# EAGLE board 190_Final.postroute (EAGLE 7.5.0)
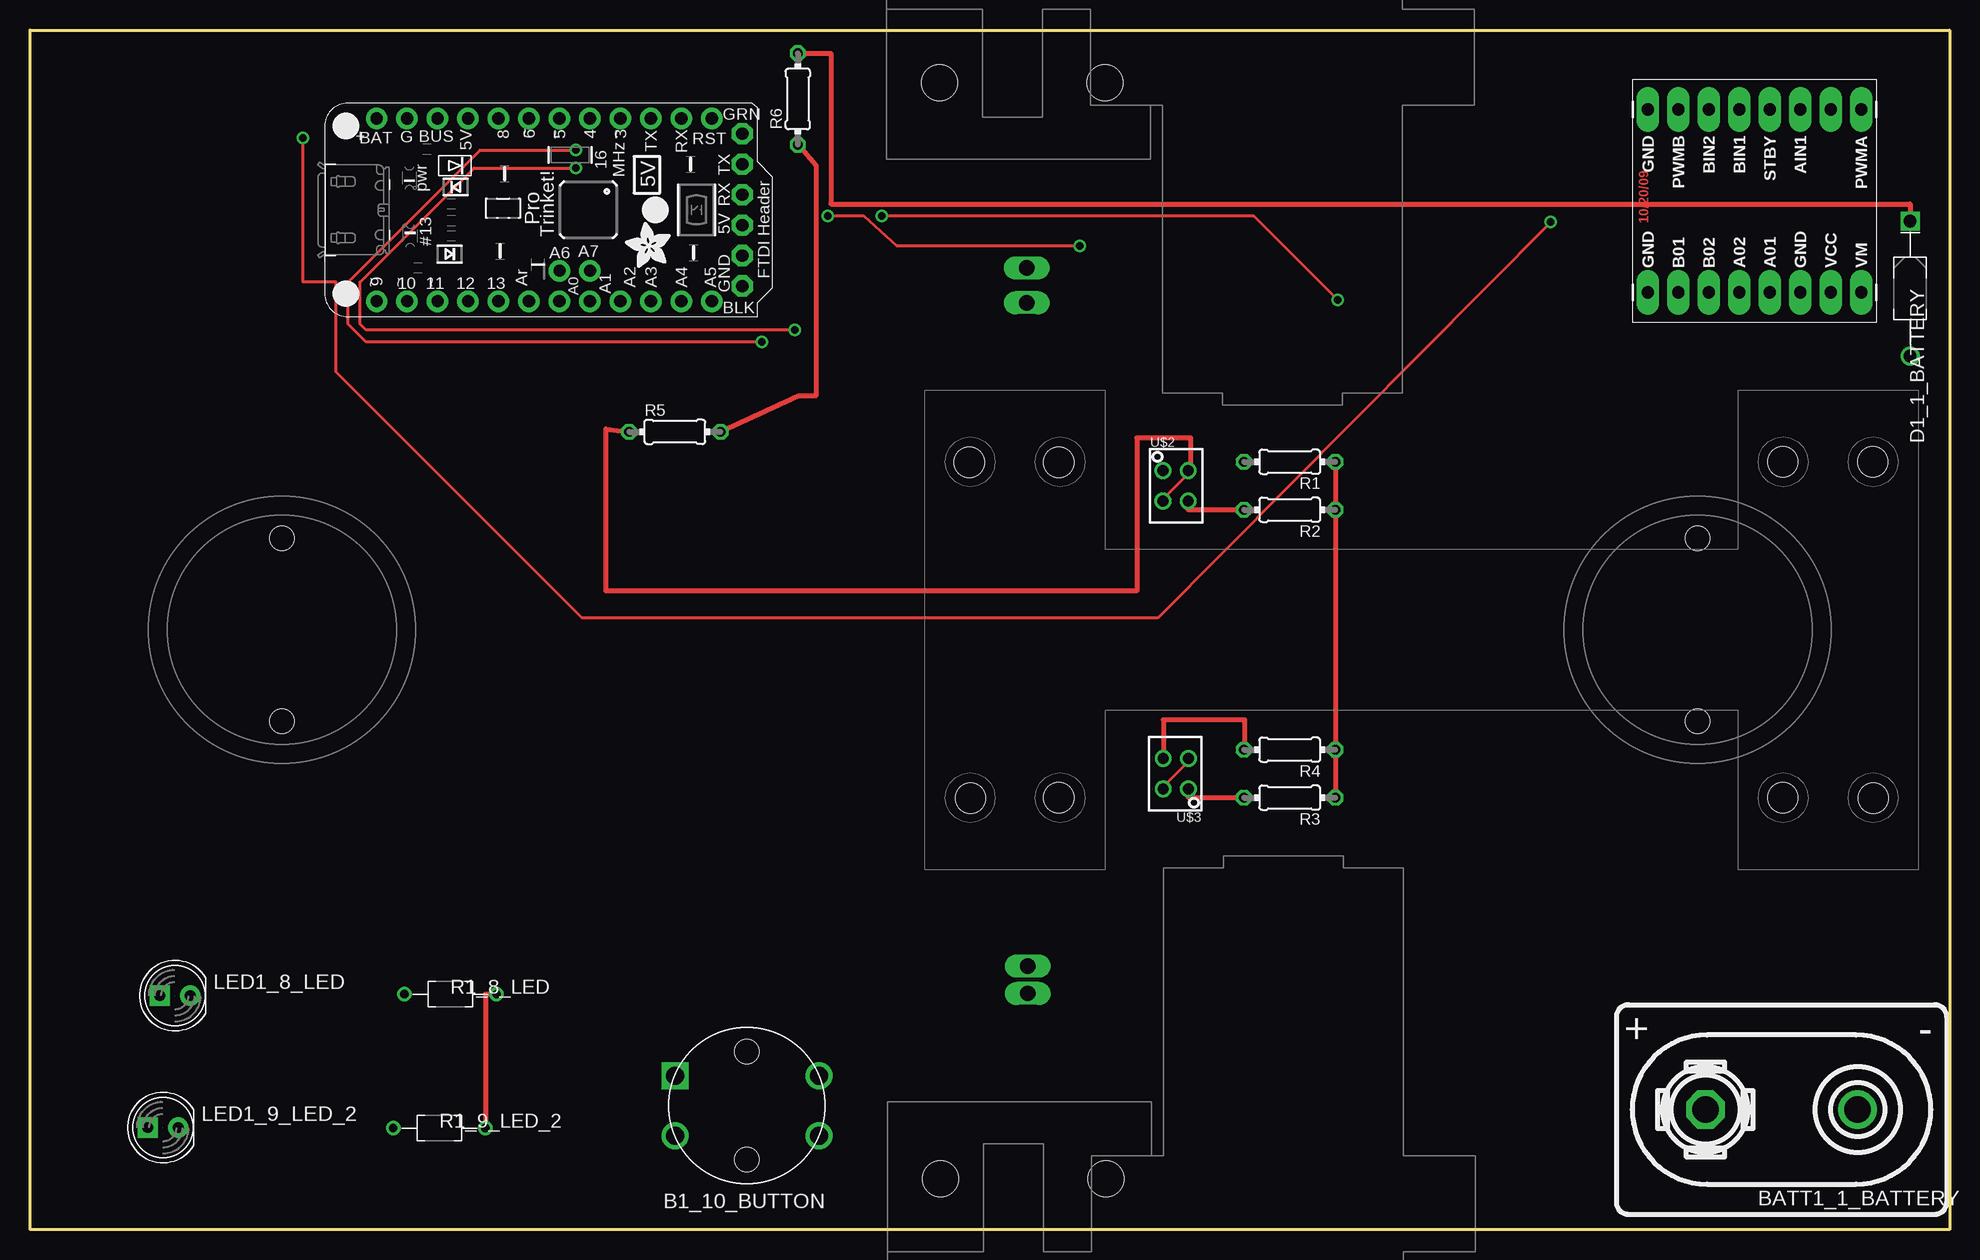
[diagram p0: board, top side]
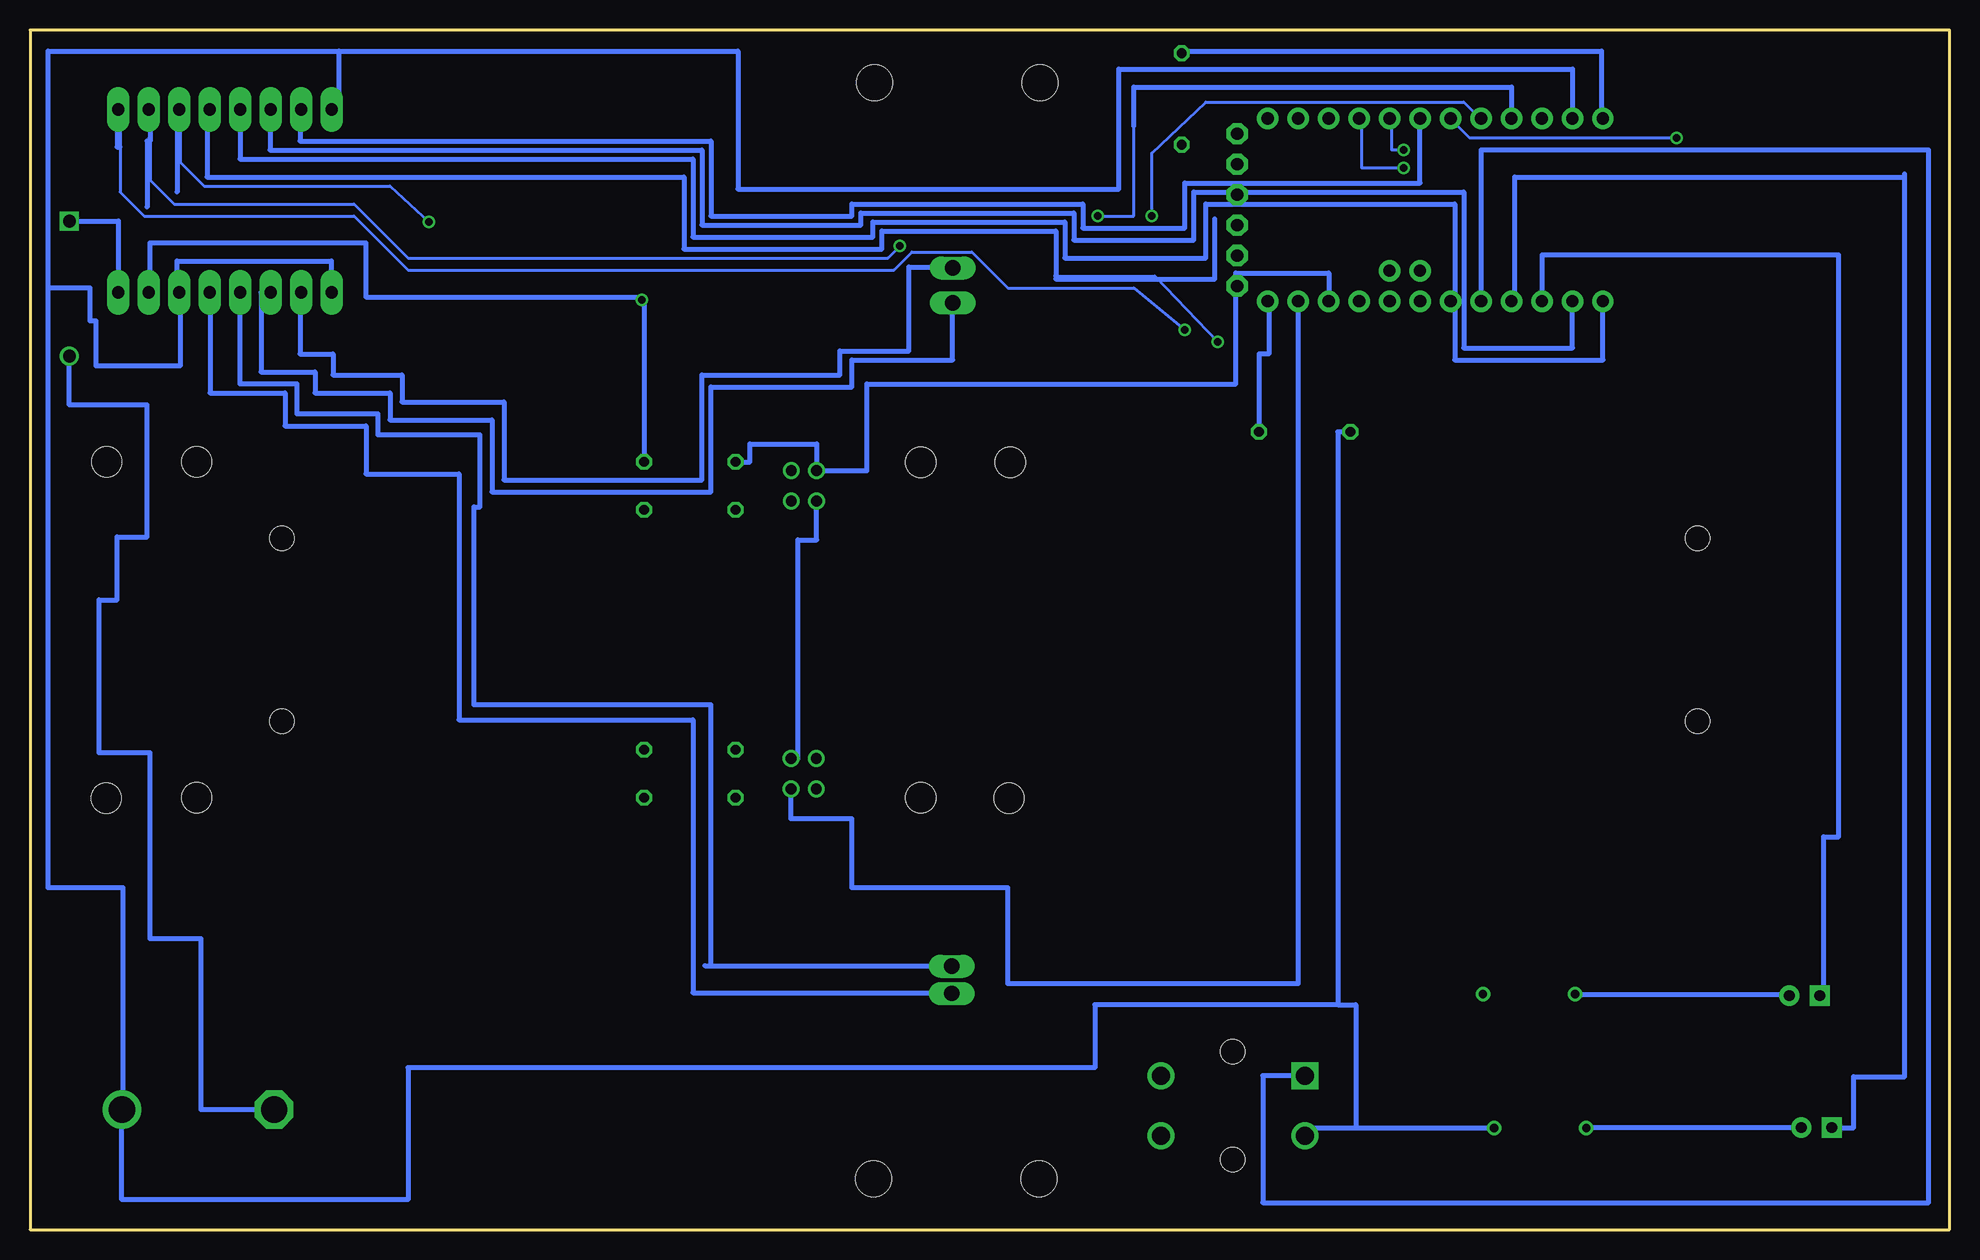
[diagram p1: board, bottom side, seen from below]

Size 160 x 100 mm. Coordinates in mm from the lower left corner, seen from the top.
Outline: 0,0 0,100 160,100 160,0 0,0
Copper layers (1*16): Top 0.035mm / dielectric 1.5mm / Bottom 0.035mm
Design rules "default *": minimum track width 0.6mm, minimum drill 0.9mm, track to track 15mil, track to pad 0.60mm, pad to pad 0.50mm, via to via 0.38mm, smd to smd 8mil, copper to edge 40mil, drill to drill 15mil, minimum pad ring 10mil, minimum via ring 8mil, stop-mask expansion 4mil, vias tented up to drill 0mil, thermal gap 10mil
tRestrict: area 55.8,75.8 to 58,78.8; area 55.8,91 to 58,94; area 53.2,75.8 to 55.5,78.8; area 53,91 to 55.2,94; area 52.5,11.8 to 55,14.2; area 52.5,6.5 to 55.5,9.5; area 50.8,75.8 to 53,78.8; area 50.5,91 to 52.8,94; area 48,75.8 to 50.2,78.8; area 48,91 to 50.2,94; area 45.5,75.8 to 47.8,78.8; area 45.5,91 to 47.8,94; 19 more areas

## Footprints (pad centres in the part's own frame; a part is rotated, then mirrored left to right if it is on the bottom)
BUTTON-TACTILE-ROUND-ADAFRUIT1009 = drill 1.5 square: P -6,2.5 | drill 1.5: P2 6,2.5; S -6,-2.5; S2 6,-2.5 | hole 2: 0,-4.5; 0,4.5
BATTERY_9V_KEYSTONE_968 = drill 2.2: N 6.35,0 | drill 2.2 octagon: P -6.35,0
DIOAD1125W78L520D270_HS = drill 1.06 pad 1.59: A 5.625,0 | drill 1.06 pad 1.59 square: C -5.625,0
SPARKFUN_DUAL_MOTOR_DRIVER = drill 1.016 pad 1.88 long: A01 7.62,1.27; A02 7.62,-1.27; AIN1 -7.62,3.81; AIN2 -7.62,6.35; B01 7.62,-6.35; B02 7.62,-3.81; BIN1 -7.62,-1.27; BIN2 -7.62,-3.81; GND -7.62,-8.89; GND1 7.62,3.81; GND2 7.62,-8.89; PWMA -7.62,8.89; PWMB -7.62,-6.35; STBY -7.62,1.27; VCC 7.62,6.35; VM 7.62,8.89
SOLARBOTICS_G2_LEFT = drill 1.27 long: + -40.545,-3.68; - -43.45,-3.68 | hole 3: -25.1,-10.2; -25.1,3.6
LED5MM = drill 0.9 pad 1.676 square: A -1.27,0 | drill 0.9 pad 1.676: K 1.27,0
0204/7 = drill 0.813 octagon: 1 -3.81,0; 2 3.81,0
RESAD770W45L370D210_HS = drill 0.7 pad 1.1: 1 -3.85,0; 2 3.85,0
SOLARBOTICS_G2 = drill 1.27 long: + 40.545,-3.68; - 42.815,-3.68 | hole 3: 25.1,-10.2; 25.1,3.6
ADAFRUIT-PRO-TRINKET-5V = drill 1.016 pad 1.778: +5V 7.62,24.13; A0 -7.62,16.51; A1 -7.62,13.97; A2 -7.62,11.43; A3 -7.62,8.89; A4 -7.62,6.35; A5 -7.62,3.81; AREF -7.62,19.05; D3 7.62,11.43; D4 7.62,13.97; D5 7.62,16.51; D6 7.62,19.05; D8 7.62,21.59; D9 -7.62,31.75; D10 -7.62,29.21; D11 -7.62,26.67; D12 -7.62,24.13; D13 -7.62,21.59; GND2 7.62,29.21; RESET 7.62,3.81; RXD1 7.62,6.35; TXD1 7.62,8.89; VBAT 7.62,31.75; VBUS1 7.62,26.67 | drill 1 pad 1.778: A6 -5.08,16.51; A7 -5.08,13.97 | drill 1.016 pad 1.778 octagon: DTR/RTS 6.35,1.27; GND -6.35,1.27; GND1 -3.81,1.27; RXD 1.27,1.27; TXD 3.81,1.27; VBUS -1.27,1.27
ADAFRUIT-3/4IN-CASTER = hole 2: -7.62,0; 7.62,0
PHONE_STAND = hole 2.5: -30.25,-14; -30.25,13.95; -37.6,-14.05; -37.7,13.95; 30.1,-14; 30.1,14; 37.6,14; 37.65,-14.05
QRD1114 = drill 0.9: 1 -1.067,1.27; 2 -1.067,-1.27; 3 1.041,-1.27; 4 1.041,1.27

## Placement (x,y rotation side)
B1_10_BUTTON  BUTTON-TACTILE-ROUND  [BUTTON-TACTILE-ROUND-ADAFRUIT1009]  59.75,10.33 0 top
BATT1_1_BATTERY  BATTERY-9V-VERTICAL  [BATTERY_9V_KEYSTONE_968]  146,10 0 top
D1_1_BATTERY  [DIOAD1125W78L520D270_HS]  156.71,78.44 270 top
DRVR_2_DRIVE  SPARKFUN_DUAL_MOTOR_DRIVER-BOB  [SPARKFUN_DUAL_MOTOR_DRIVER]  143.75,85.75 270 top
L_2_DRIVE  SOLARBOTICS_GM2_LEFT  [SOLARBOTICS_G2_LEFT]  79.41,120.71 90 top
LED1_8_LED  [LED5MM]  12.08,19.5 0 top
LED1_9_LED_2  [LED5MM]  11.08,8.5 0 top
R1  [0204/7]  105,64 180 top
R1_8_LED  330  [RESAD770W45L370D210_HS]  35.04,19.62 0 top
R1_9_LED_2  330  [RESAD770W45L370D210_HS]  34.12,8.46 0 top
R2  [0204/7]  105,60 180 top
R3  [0204/7]  105,36 180 top
R4  [0204/7]  105,40 180 top
R5  [0204/7]  53.75,66.5 0 top
R6  [0204/7]  64,94.25 90 top
R_2_DRIVE  SOLARBOTICS_GM2  [SOLARBOTICS_G2]  79.49,-20.86 90 top
U1_0_BRAIN  ADAFRUIT-PRO-TRINKET-5V-BOB  [ADAFRUIT-PRO-TRINKET-5V]  60.64,85 90 top
U1_6_CASTER  CASTERADAFRUIT-3/4IN  [ADAFRUIT-3/4IN-CASTER]  21,50 90 top
U1_7_CASTER_2  CASTERADAFRUIT-3/4IN  [ADAFRUIT-3/4IN-CASTER]  139,50 90 top
U$1  [PHONE_STAND]  116,50 0 top
U$2  QRD1114  [QRD1114]  95.5,62 0 top
U$3  QRD1114  [QRD1114]  95.5,38 180 top

## Library data of the parts
B1_10_BUTTON = Components; DIST: Adafruit; DISTPN: 1009; HIERARCHY_NAME: button.B1
BATT1_1_BATTERY = Components; HIERARCHY_NAME: battery.BATT1
D1_1_BATTERY = KoalaBuild; DATASHEET: http://www.st.com/web/en/resource/technical/document/datasheet/CD00001625.pdf; DATA_SHEET: http://www.st.com/web/en/resource/technical/document/datasheet/CD00001625.pdf; DB: /home/michael/gtron_devel/Gadgets/Tools/Koala/Koala/PartLibrary/Digikey/Schottky-Diodes-TH.csv; DEVICE: TH-DO-41-AND-DO-204AL; DIST: Digikey; DISTPN: 497-4547-1-ND; HIERARCHY_NAME: battery.D1; IMAGE: http://media.digikey.com/photos/STMicro%20Photos/1N5819.JPG; IRECT: 1A; MFR: STMicroelectronics; MIN_QTY: 1; MPN: 1N5817; PACKAGE: DIOAD1125W78L520D270_HS; PRICE: $0.57; SIZE: TH; STOCK: STOCK; VALUE: 450mV; VREV: 20V
DRVR_2_DRIVE = BOBs; DIST: Sparkfun; DISTPN: 9457; HIERARCHY_NAME: drive.DRVR
L_2_DRIVE = Components; DIST: Solarbotics; DISTPN: gm2; HIERARCHY_NAME: drive.L
LED1_8_LED = Components; DIST: Adafruit; DISTPN: 298; HIERARCHY_NAME: led.LED1
LED1_9_LED_2 = Components; DIST: Adafruit; DISTPN: 298; HIERARCHY_NAME: led_2.LED1
R1-R6 = resistor
R1_8_LED = KoalaBuild; CASE: TH; DATASHEET: http://www.yageo.com/NewPortal/yageodocoutput?fileName=/pdf/throughhole/Yageo_LR_CFR_2013.pdf; DATA_SHEET: http://www.yageo.com/NewPortal/yageodocoutput?fileName=/pdf/throughhole/Yageo_LR_CFR_2013.pdf; DB: /home/michael/gtron_devel/Gadgets/Tools/Koala/Koala/PartLibrary/Digikey/Resistors-TH.csv; DEVICE: TH-1/6W-CARBON; DIST: Digikey; DISTPN: 330EBK-ND; HIERARCHY_NAME: led.R1; IMAGE: http://media.digikey.com/Renders/Yageo%20Renders/CFR-12JR-330R.jpg; MFR: Yageo; MIN_QTY: 1; MPN: CFR-12JB-52-330R; PACKAGE: RESAD770W45L370D210_HS; PRICE: $0.10; PWR: 167mW; SIZE: TH; STOCK: STOCK; TOL: 5%; VALUE_QUERY: 330
R1_9_LED_2 = KoalaBuild; CASE: TH; DATASHEET: http://www.yageo.com/NewPortal/yageodocoutput?fileName=/pdf/throughhole/Yageo_LR_CFR_2013.pdf; DATA_SHEET: http://www.yageo.com/NewPortal/yageodocoutput?fileName=/pdf/throughhole/Yageo_LR_CFR_2013.pdf; DB: /home/michael/gtron_devel/Gadgets/Tools/Koala/Koala/PartLibrary/Digikey/Resistors-TH.csv; DEVICE: TH-1/6W-CARBON; DIST: Digikey; DISTPN: 330EBK-ND; HIERARCHY_NAME: led_2.R1; IMAGE: http://media.digikey.com/Renders/Yageo%20Renders/CFR-12JR-330R.jpg; MFR: Yageo; MIN_QTY: 1; MPN: CFR-12JB-52-330R; PACKAGE: RESAD770W45L370D210_HS; PRICE: $0.10; PWR: 167mW; SIZE: TH; STOCK: STOCK; TOL: 5%; VALUE_QUERY: 330
R_2_DRIVE = Components; DIST: Solarbotics; DISTPN: gm2; HIERARCHY_NAME: drive.R
U1_0_BRAIN = BOBs; DIST: Adafruit; DISTPN: 2000; HIERARCHY_NAME: brain.U1
U1_6_CASTER = Components; DIST: Adafruit; DISTPN: 1200; HIERARCHY_NAME: caster.u1
U1_7_CASTER_2 = Components; DIST: Adafruit; DISTPN: 1200; HIERARCHY_NAME: caster_2.u1
U$1 = 3DPrintedParts
U$2 U$3 = SparkFun-Sensors

## Nets
+5V_0_BRAIN: DRVR_2_DRIVE.VCC R1.1 R2.1 R3.1 R4.1 U1_0_BRAIN.+5V
A0_0_BRAIN: U1_0_BRAIN.A0
A1_0_BRAIN: U1_0_BRAIN.A1
A01_2_DRIVE: DRVR_2_DRIVE.A01 R_2_DRIVE.+
A2_0_BRAIN: U1_0_BRAIN.A2
A02_2_DRIVE: DRVR_2_DRIVE.A02 R_2_DRIVE.-
A3_0_BRAIN: R1.2 U1_0_BRAIN.A3 U$2.1
A4_0_BRAIN: R3.2 U1_0_BRAIN.A4 U$3.1
A5_0_BRAIN: R5.2 R6.1 U1_0_BRAIN.A5
A6_0_BRAIN: U1_0_BRAIN.A6
A7_0_BRAIN: U1_0_BRAIN.A7
AREF_0_BRAIN: U1_0_BRAIN.AREF
B01_2_DRIVE: DRVR_2_DRIVE.B01 L_2_DRIVE.+
B02_2_DRIVE: DRVR_2_DRIVE.B02 L_2_DRIVE.-
D3_0_BRAIN: DRVR_2_DRIVE.PWMA U1_0_BRAIN.D3
D4_0_BRAIN: DRVR_2_DRIVE.STBY U1_0_BRAIN.D4
D5_0_BRAIN: DRVR_2_DRIVE.PWMB U1_0_BRAIN.D5
D6_0_BRAIN: DRVR_2_DRIVE.AIN1 U1_0_BRAIN.D6
D8_0_BRAIN: DRVR_2_DRIVE.AIN2 U1_0_BRAIN.D8
D9_0_BRAIN: DRVR_2_DRIVE.BIN1 U1_0_BRAIN.D9
D10_0_BRAIN: DRVR_2_DRIVE.BIN2 U1_0_BRAIN.D10
D11_0_BRAIN: LED1_8_LED.A U1_0_BRAIN.D11
D12_0_BRAIN: LED1_9_LED_2.A U1_0_BRAIN.D12
D13_0_BRAIN: B1_10_BUTTON.P U1_0_BRAIN.D13
DISCONNECTED: U1_0_BRAIN.GND
DISCONNECTED_2: U1_0_BRAIN.GND1
DISCONNECTED_3: U1_0_BRAIN.VBUS
DTR/RTS_0_BRAIN: U1_0_BRAIN.DTR/RTS
GND_0_BRAIN: B1_10_BUTTON.S BATT1_1_BATTERY.N DRVR_2_DRIVE.GND DRVR_2_DRIVE.GND1 DRVR_2_DRIVE.GND2 R1_8_LED.2 R1_9_LED_2.2 R5.1 U1_0_BRAIN.GND2 U$2.2 U$2.4 U$3.2 U$3.4
N$1_1_BATTERY: BATT1_1_BATTERY.P D1_1_BATTERY.A
N$1_8_LED: LED1_8_LED.K R1_8_LED.1
N$1_9_LED_2: LED1_9_LED_2.K R1_9_LED_2.1
N$5: R2.2 U$2.3
N$7: R4.2 U$3.3
POS_1_BATTERY: D1_1_BATTERY.C DRVR_2_DRIVE.VM R6.2 U1_0_BRAIN.VBAT
RESET_0_BRAIN: U1_0_BRAIN.RESET
RXD1_0_BRAIN: U1_0_BRAIN.RXD1
RXD_0_BRAIN: U1_0_BRAIN.RXD
TXD1_0_BRAIN: U1_0_BRAIN.TXD1
TXD_0_BRAIN: U1_0_BRAIN.TXD
VBUS1_0_BRAIN: U1_0_BRAIN.VBUS1

## Tracks (layer width: path | path; a pad name or v marks a point on that pad's centre or on a via)
+5V_0_BRAIN  (via drill 0.6)
  Top 0.254: v71,84.5 102,84.5 v109,77.5
  Top 0.406: R3.1 R4.1 R2.1 R1.1
  Bottom 0.254: 68,92 68,84.5 v71,84.5 | v109,77.5 108.81,77.5
  Bottom 0.406: 68,92 68,95.25 36.51,95.25 U1_0_BRAIN.+5V | R1.1 108.81,77.5 108.81,77.75 132,77.75 132,82.25 150,82.25 150,78.13 DRVR_2_DRIVE.VCC
A01_2_DRIVE
  Bottom 0.406: R_2_DRIVE.+ 83.17,19.75 104.75,19.75 104.75,42.5 124.25,42.5 124.25,63 132,63 132,67 138.75,67 138.75,69.75 145,69.75 145,78.13 DRVR_2_DRIVE.A01
A02_2_DRIVE
  Bottom 0.406: 103.25,22 103.25,43.75 123,43.75 123,60.25 122.5,60.25 122.5,66.25 131,66.25 131,68 137.75,68 137.75,70.5 142.48,70.5 DRVR_2_DRIVE.A02 | 103.25,22 83.17,22 R_2_DRIVE.- | 103.75,22 103.25,22
A3_0_BRAIN
  Bottom 0.406: U1_0_BRAIN.A3 51.75,79.75 59.5,79.75 59.5,70.5 90.25,70.5 90.25,63.27 U$2.1 94.43,65.5 100,65.5 100,64 R1.2
A4_0_BRAIN
  Top 0.406: U$3.1 96.57,36 R3.2
  Bottom 0.406: U1_0_BRAIN.A4 54.29,20.5 78.5,20.5 78.5,28.5 91.5,28.5 91.5,34.25 96.57,34.25 U$3.1
A5_0_BRAIN
  Top 0.406: R5.2 64.06,69.5 65.5,69.5 65.5,88.69 R6.1
  Bottom 0.406: R5.2 57.56,73 56.75,73 56.75,77.39 U1_0_BRAIN.A5
B01_2_DRIVE
  Bottom 0.406: L_2_DRIVE.+ 83.09,80.25 86.75,80.25 86.75,73.25 92.5,73.25 92.5,71.25 104,71.25 104,62.5 120.5,62.5 120.5,69 129,69 129,71.25 134.75,71.25 134.75,73 137.5,73 137.5,78.13 DRVR_2_DRIVE.B01
B02_2_DRIVE
  Bottom 0.406: L_2_DRIVE.- 83.09,72.5 91.5,72.5 91.5,70.25 103.25,70.25 103.25,61.5 121.5,61.5 121.5,67.5 130,67.5 130,69.75 136.25,69.75 136.25,71.5 140.75,71.5 140.75,78.13 DRVR_2_DRIVE.B02
D3_0_BRAIN  (via drill 0.6)
  Top 0.254: v63.75,75 28,75 27.5,75.5 27.5,79 37,88.5 v45.5,88.5
  Bottom 0.254: v63.75,75 68,78.5 78.5,78.5 81.5,81.5 86.5,81.5 88,80 128.5,80 133,84.5 150.5,84.5 152.5,86.5 152.5,93 DRVR_2_DRIVE.PWMA | U1_0_BRAIN.D3 49,92.5 49,88.5 v45.5,88.5
  Bottom 0.406: DRVR_2_DRIVE.PWMA 152.75,93.37 152.75,90.25 152.5,90.25
D4_0_BRAIN  (via drill 0.6)
  Top 0.254: v61,74 28,74 26.5,75.5 26.5,79 37.5,90 v45.5,90
  Bottom 0.254: v61,74 66.25,79.5 74.5,79.5 | U1_0_BRAIN.D4 46.5,92.5 46.5,90 v45.5,90
  Bottom 0.406: 61.25,84.25 61.25,79.25 74.5,79.25 74.5,79.5 74.5,83.25 89,83.25 89,81.75 105.5,81.75 105.5,87.75 145.25,87.75 145.25,93.37 DRVR_2_DRIVE.STBY
D5_0_BRAIN
  Bottom 0.406: U1_0_BRAIN.D5 44.13,87.25 63.75,87.25 63.75,83.5 72.25,83.5 72.25,85.5 91.5,85.5 91.5,84.5 103.25,84.5 103.25,90.75 137.5,90.75 137.5,93.37 DRVR_2_DRIVE.PWMB
D6_0_BRAIN  (via drill 0.6)
  Top 0.254: v22.75,91 22.75,79 25.5,79 25.5,71.5 46,51 94,51 v126.75,84
  Bottom 0.254: U1_0_BRAIN.D6 41.5,92.5 40,91 v22.75,91 | v126.75,84 130,87 145.5,87 147.5,89 147.5,93 DRVR_2_DRIVE.AIN1
  Bottom 0.406: DRVR_2_DRIVE.AIN1 147.75,93.37 147.75,86.5
D8_0_BRAIN  (via drill 0.6)
  Top 0.254: v66.5,84.5 69.5,84.5 72.25,82 v87.5,82
  Bottom 0.254: v66.5,84.5 66.5,89.75 62,94 40.5,94 39.5,93 U1_0_BRAIN.D8 | 150,91 150,87.5 148,85.5 133,85.5 128.5,81 88.5,81 v87.5,82
  Bottom 0.406: DRVR_2_DRIVE.AIN2 150,93.37 150,91 150,90.75 150.25,90.75 150.25,85.25
D9_0_BRAIN
  Bottom 0.406: U1_0_BRAIN.D9 28.89,72.5 41.25,72.5 41.25,85.5 62,85.5 62,81 73.75,81 73.75,84 89.75,84 89.75,82.75 104.75,82.75 104.75,89.25 142.5,89.25 142.5,93.37 DRVR_2_DRIVE.BIN1
D10_0_BRAIN
  Bottom 0.406: U1_0_BRAIN.D10 31.43,73.5 40.5,73.5 40.5,86.5 63,86.5 63,82.5 73,82.5 73,84.75 90.75,84.75 90.75,83.75 104,83.75 104,90 140,90 140,93.37 DRVR_2_DRIVE.BIN2
D11_0_BRAIN
  Bottom 0.406: U1_0_BRAIN.D11 33.97,81.25 9.25,81.25 9.25,32.75 10.5,32.75 10.5,19.5 LED1_8_LED.A
D12_0_BRAIN
  Bottom 0.406: U1_0_BRAIN.D12 36.25,77.39 36.25,87.75 3.75,87.75 | LED1_9_LED_2.A 8,8.5 8,12.75 3.75,12.75 3.75,87.75 | 3.75,87.75 3.75,88
D13_0_BRAIN
  Bottom 0.406: B1_10_BUTTON.P 57.25,12.83 57.25,2.25 1.75,2.25 1.75,90 39.05,90 U1_0_BRAIN.D13 39.05,76.75 39.25,76.75
GND_0_BRAIN
  Top 0.254: U$3.4 94.5,37 96.5,39 U$3.2 | U$2.2 94.5,61 96.5,63 U$2.4
  Top 0.406: R5.1 48,66.75 48,53.25 92.25,53.25 92.25,66 96.75,66 96.75,63.27 U$2.4 | R1_8_LED.2 37.97,19.62 R1_9_LED_2.2
  Bottom 0.406: B1_10_BUTTON.S 53.75,7.75 54.25,7.75 54.25,8.45 49.5,8.45 | 51,18.75 49.5,18.75 49.5,8.45 | 51,18.75 71.25,18.75 71.25,13.5 128.5,13.5 128.5,2.5 152.35,2.5 BATT1_1_BATTERY.N 152.25,10 152.25,28.5 158.5,28.5 158.5,78.5 | 51,18.75 51,66.5 R5.1 | R1_9_LED_2.2 49.5,8.45 | U1_0_BRAIN.GND2 31.43,96.75 69.25,96.75 69.25,86.75 101,86.75 101,98.25 134.25,98.25 | U$2.2 94.43,57.5 96,57.5 96,39.27 U$3.2 | 134.25,98.25 134.25,93.37 DRVR_2_DRIVE.GND | 135,78.13 DRVR_2_DRIVE.GND2 134.86,80.75 147.75,80.75 147.75,78.13 DRVR_2_DRIVE.GND1 147.5,78.13 147.5,72 154.5,72 154.5,75.75 155,75.75 155,78.5 158.5,78.5 | 158.5,78.5 158.5,98.25 134.25,98.25
N$1_1_BATTERY
  Bottom 0.406: 139,10 BATT1_1_BATTERY.P 145.75,10 145.75,24.25 150,24.25 150,39.75 154.25,39.75 154.25,52.5 152.75,52.5 152.75,57.75 150.25,57.75 150.25,68.75 156.72,68.75 D1_1_BATTERY.A
N$1_8_LED
  Bottom 0.406: R1_8_LED.1 13.35,19.62 LED1_8_LED.K
N$1_9_LED_2
  Bottom 0.406: R1_9_LED_2.1 30.27,8.5 LED1_9_LED_2.K
N$5
  Top 0.406: U$2.3 96.54,60 R2.2
N$7
  Top 0.406: U$3.3 94.46,42.5 101.25,42.5 101.25,40 R4.2
POS_1_BATTERY
  Top 0.406: R6.2 66.75,98.06 66.75,85.5 156.72,85.5 D1_1_BATTERY.C
  Bottom 0.406: R6.2 64,98.25 29,98.25 29,92.62 U1_0_BRAIN.VBAT | DRVR_2_DRIVE.VM 152.64,84.07 D1_1_BATTERY.C